# Altium PCB VCU_PCB.PcbDoc (part 2 of 2)
Units mm, origin at the board's own origin, x right, y up, seen from the top; angles counter-clockwise.
Board outline 94 x 87 mm, 4 copper layers (Top Layer, Layer 1, Layer 2, Bottom Layer), stack 0.603 mm thick; 131 components, 89 nets, 421 pads, 70 vias.
Unrouted connection lines stored in the file: 10.
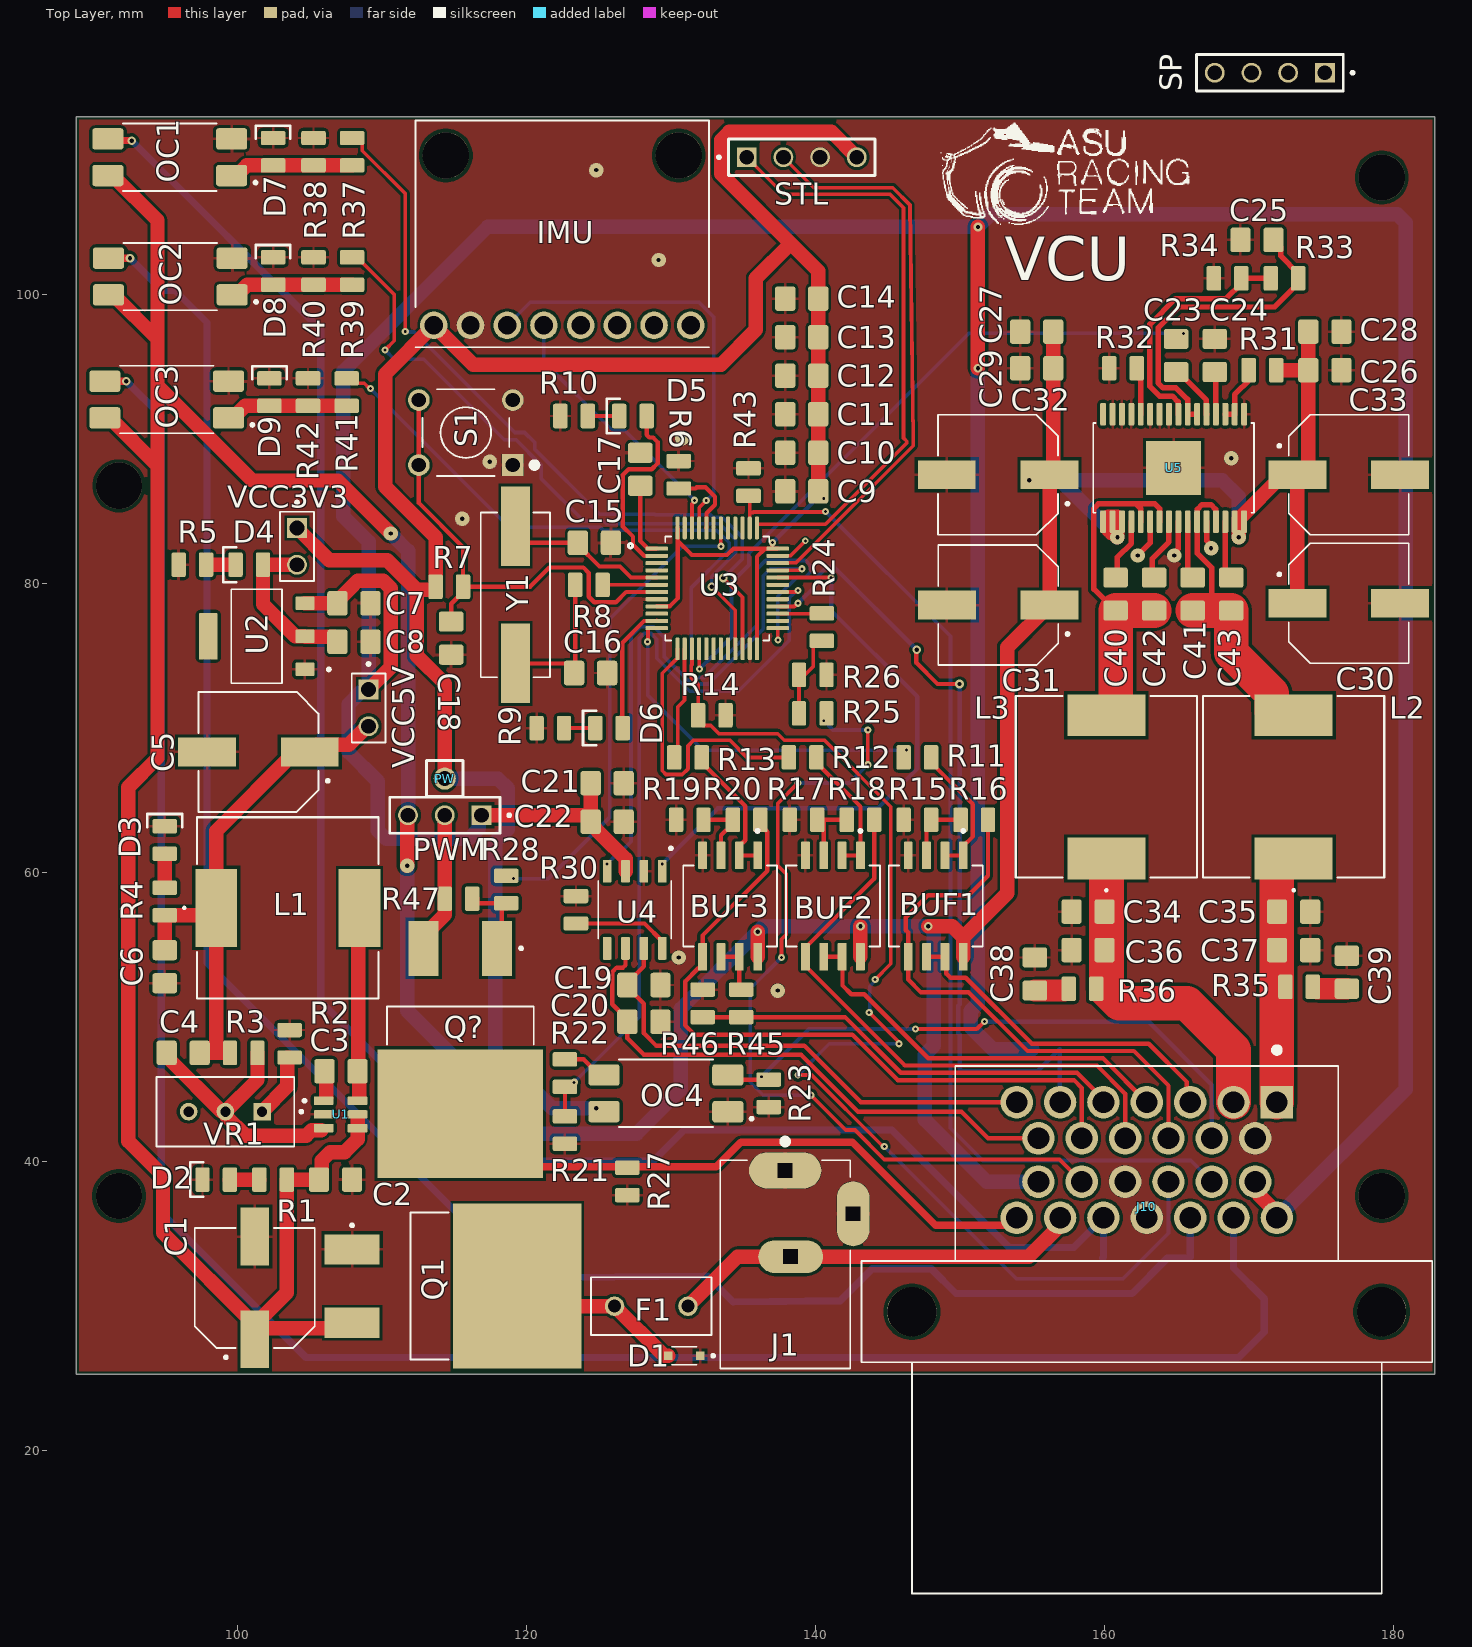
[diagram p0: Top Layer view]

## Via types
v1: diameter 0.5, hole 0.2, Top Layer to Bottom Layer, 36 vias
v2: diameter 1, hole 0.3, Top Layer to Bottom Layer, 17 vias
v3: diameter 0.6, hole 0.3, Top Layer to Bottom Layer, 12 vias
v4: diameter 3.2, hole 3.2, Top Layer to Bottom Layer, 4 vias
v5: diameter 0.45, hole 0.2, Top Layer to Bottom Layer, 1 vias

## Nets (pads, with @x,y where several pads share a name; then routed paths per layer and width w, separated by ;. In a path a pad name is that pad's centre, name@x,y a point inside that pad or via, vN(x,y) a via of type N, cw(c..) or ccw(c..) an arc to the next point about the centre after c; other vN are vias at no path point) (continued)
pads on no net: IMU. IMU.AD0 IMU.INT IMU.XCL IMU.XDA J10. U2.4 U3.3 U3.4 U3.10 U3.17 U3.18 U3.19 U3.20 U3.26 U3.29 U3.31 U3.39 U3.40 U3.41 U3.43 U4.5 U5.16 VR1.3
copper on no net: | length 30.3
  Top Layer w0.3: 132.207,49.977 134.874,49.977 142.063,49.977 145.919,46.12 158.107,46.12 159.941,44.287 159.941,44.091
  other v4: 91.821,37.592 179.197,37.592 91.821,86.741 179.197,108.077

## Polygon pours and split planes (outlines as drawn)
GND on Top Layer "GND_L01_P001" (solid, pour order 1): 182.88,25.527 182.753,25.4 88.9,25.4 88.9,112.268 89.027,112.141 182.88,112.141
VCC12V on Top Layer "VCC12V_L01_P000" (solid, pour order 0): 169.799,84.963 168.91,84.963 168.91,83.185 169.799,83.185
GND on Bottom Layer "GND_L04_P002" (solid, pour order 2): 182.88,25.273 88.773,25.273 88.773,112.268 182.88,112.268
no net on Layer 2 (split plane): 182.37,25.783 89.39,25.783 89.39,111.763 182.37,111.763
GND on Layer 1 (split plane): 182.37,25.783 89.39,25.783 89.39,111.763 182.37,111.763

## Silkscreen, mask and mechanical layers (free items; w line width, h text height)
Top Overlay:
  drawing of 99 lines, arcs and shapes, not listed
  text "VCU" at 153.1,100.957 h3
Bottom Overlay:
  drawing of 297 lines, arcs and shapes, not listed
  text "VCU" at 142.891,59.166 h5
  text "Ibraam Robil" at 123.652,32.304 h2
  text "Yousef Osama" at 123.652,29.637 h2
Mechanical 1:
  the board outline again, w0.254

## Text inside footprints (layer, text, board x,y; h text height)
D2: Mechanical 13 "+" at 100.319,39.735 h1
D3: Mechanical 13 "+" at 95.996,60.463 h1 r270
D4: Mechanical 13 "+" at 102.605,82.28 h1
D5: Mechanical 13 "+" at 129.148,92.567 h1
D6: Mechanical 13 "+" at 127.497,70.977 h1
D7: Mechanical 13 "+" at 103.489,108.088 h1 r270
D8: Mechanical 13 "+" at 103.489,99.833 h1 r270
D9: Mechanical 13 "+" at 103.235,91.451 h1 r270